# EAGLE board esp8266-dimmer (EAGLE 7.5.0)
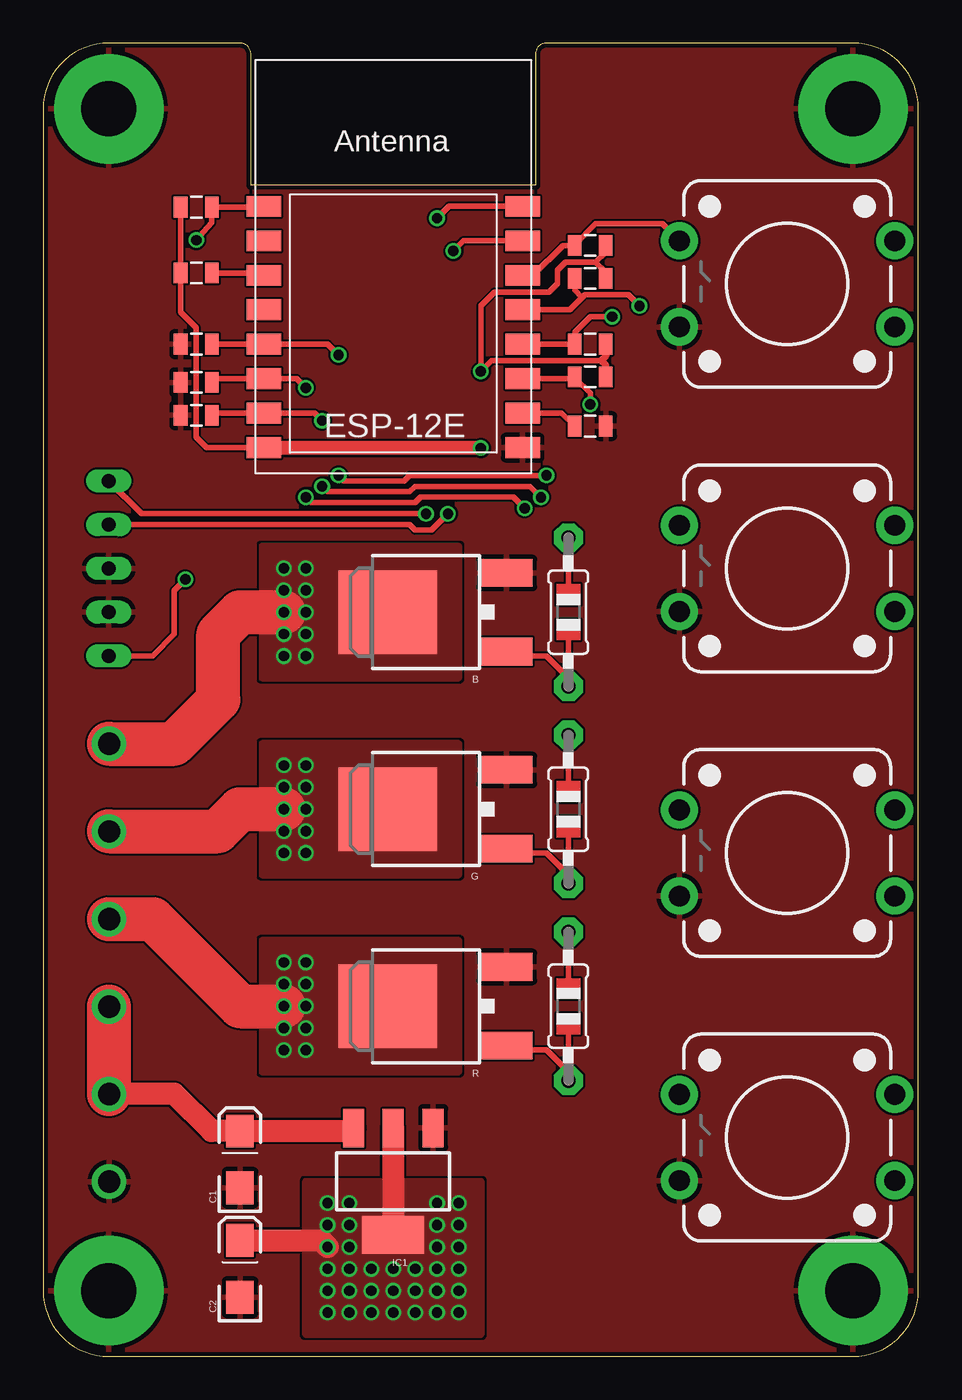
[diagram p0: board, top side]
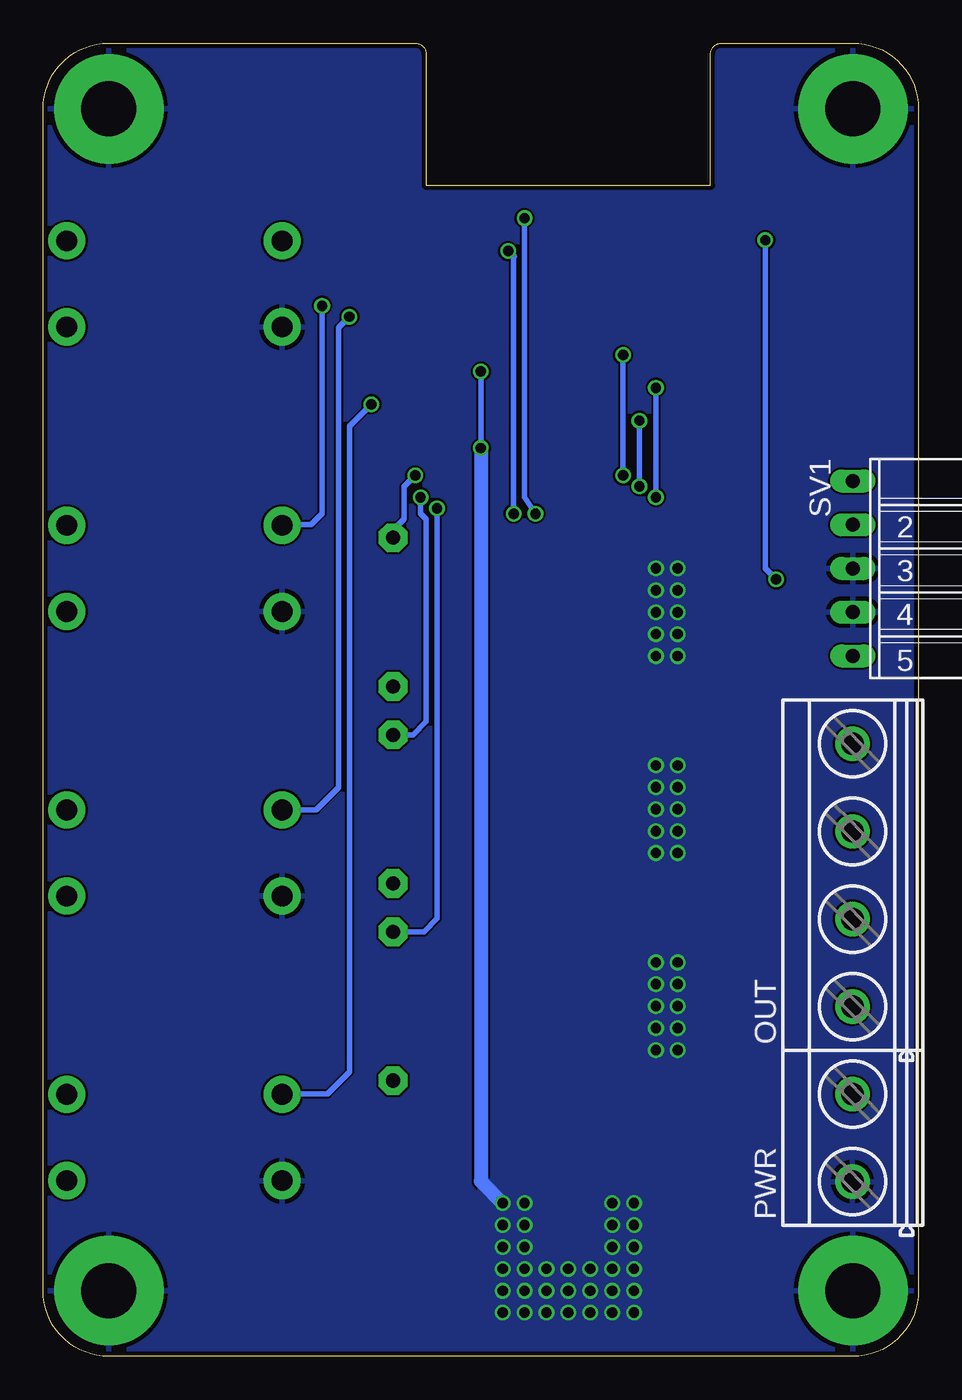
[diagram p1: board, bottom side, seen from below]

Size 50.8 x 76.2 mm. Coordinates in mm from the lower left corner, seen from the top.
Outline: 3.81,0 46.99,0 arc90 50.8,3.81 50.8,72.39 arc90 46.99,76.2 29.21,76.2 arc90 28.57,75.56 28.57,67.94 12.06,67.94 12.06,75.56 arc90 11.43,76.2 3.81,76.2 arc90 0,72.39 0,3.81 arc90 3.81,0
Copper layers (1*16): Top 0.035mm / dielectric 1.5mm / Bottom 0.035mm
Design rules "dirt_cheap_dirty_boards.v1": minimum track width 5mil, minimum drill 12mil, track to track 5mil, track to pad 5mil, pad to pad 5mil, via to via 5mil, smd to smd 0mil, copper to edge 10mil, drill to drill 10mil, minimum pad ring 10mil, minimum via ring 6mil, stop-mask expansion 2mil, vias tented up to drill 25mil, thermal gap 10mil

## Footprints (pad centres in the part's own frame; a part is rotated, then mirrored left to right if it is on the bottom)
DPAK = smd 1.6 x 3: 1 -2.28,-5.31; 3 2.28,-5.31 | smd 4.826 x 5.715: 4 0,1.588
EIA3216-KIT = smd 1.9 x 1.6: A 1.65,0; C -1.65,0
TACTILE-PTH-12MM = drill 1.2 pad 2.159: 1 6.25,-2.5; 2 -6.25,-2.5; 3 6.25,2.5; 4 -6.25,2.5
ESP-12 = smd 2 x 1.2: 1 -7.5,4.5; 2 -7.5,2.5; 3 -7.5,0.5; 4 -7.5,-1.5; 5 -7.5,-3.5; 6 -7.5,-5.5; 7 -7.5,-7.5; 8 -7.5,-9.5; 9 7.5,-9.5; 10 7.5,-7.5; 11 7.5,-5.5; 12 7.5,-3.5; 13 7.5,-1.5; 14 7.5,0.5; 15 7.5,2.5; 16 7.5,4.5
SOT223 = smd 1.219 x 2.235: 1 -2.311,-3.099; 2 0,-3.099; 3 2.311,-3.099 | smd 3.6 x 2.2: 4 0,3.099
MKDSN1,5/4-5,08 = drill 1.3 pad 2: 1 -7.641,0.025; 2 -2.561,0.025; 3 2.519,0.025; 4 7.599,0.025
MKDSN1,5/2-5,08 = drill 1.3 pad 2: 1 -2.561,0.025; 2 2.519,0.025
0805 = smd 0.8 x 1.2: 1 -0.9,0; 2 0.9,0
0805-THM-7 = drill 0.813 pad 1.676 octagon: 1 -4.318,0; 2 4.318,0
STANDOFF-ELECTRICAL = drill 3.2 pad 6.35: P1 0,0
FE05W = drill 0.813 long: 1 -5.08,0; 2 -2.54,0; 3 0,0; 4 2.54,0; 5 5.08,0

## Placement (x,y rotation side)
B  MOSFET-NCHANNELFDD8780  [DPAK]  21.59,43.18 90 top
C1  10uF  [EIA3216-KIT]  11.43,11.43 90 top
C2  10uF  [EIA3216-KIT]  11.43,5.08 90 top
DN  SWITCH-MOMENTARY-212MM  [TACTILE-PTH-12MM]  43.18,29.21 180 top
ESP-12E  [ESP-12]  20.32,62.23 0 top
G  MOSFET-NCHANNELFDD8780  [DPAK]  21.59,31.75 90 top
IC1  [SOT223]  20.32,10.16 180 top
OF  SWITCH-MOMENTARY-212MM  [TACTILE-PTH-12MM]  43.18,12.7 180 top
ON  SWITCH-MOMENTARY-212MM  [TACTILE-PTH-12MM]  43.18,62.23 180 top
OUT  MKDSN1,5/4-5,08  [MKDSN1,5/4-5,08]  3.81,27.94 90 bottom
PWR  MKDSN1,5/2-5,08  [MKDSN1,5/2-5,08]  3.81,12.7 90 bottom
R  MOSFET-NCHANNELFDD8780  [DPAK]  21.59,20.32 90 top
R1  10k  [0805]  31.75,53.98 0 top
R2  10k  [0805]  31.75,56.83 0 top
R3  10k  [0805]  31.75,58.74 0 top
R4  10k  [0805]  8.89,66.67 0 top
R5  10k  [0805]  8.89,62.87 0 top
R6  100R  [0805-THM-7]  30.48,20.32 270 top
R7  100R  [0805-THM-7]  30.48,31.75 270 top
R8  100R  [0805-THM-7]  30.48,43.18 270 top
R9  10k  [0805]  8.89,56.52 0 top
R10  10k  [0805]  8.89,54.61 0 top
R11  10k  [0805]  8.89,58.74 0 top
R12  10k  [0805]  31.75,64.45 180 top
R13  10k  [0805]  31.75,62.55 180 top
S5  STANDOFF_ELECTRICAL  [STANDOFF-ELECTRICAL]  46.99,3.81 0 top
S6  STANDOFF_ELECTRICAL  [STANDOFF-ELECTRICAL]  3.81,3.81 0 top
S7  STANDOFF_ELECTRICAL  [STANDOFF-ELECTRICAL]  46.99,72.39 0 top
S8  STANDOFF_ELECTRICAL  [STANDOFF-ELECTRICAL]  3.81,72.39 0 top
SV1  [FE05W]  3.81,45.72 270 bottom
UP  SWITCH-MOMENTARY-212MM  [TACTILE-PTH-12MM]  43.18,45.72 180 top

## Library data of the parts
B G R = SparkFun-DiscreteSemi; PROD_ID: TRANS-09984
C1 C2 = SparkFun-Passives
DN OF ON UP = SparkFun-Electromechanical; PROD_ID: SWCH-09185
ESP-12E R6-R8 = adafruit66
IC1 = SparkFun-PowerIC; PROD_ID: VREG-08170
OUT PWR = con-phoenix-508
R1-R5 R9-R13 = SparkFun-Resistors
S5-S8 = SparkFun-Electromechanical
SV1 = con-lsta; OC_FARNELL: unknown; OC_NEWARK: unknown

## Nets
+3V3: C2.A ESP-12E.8 IC1.2 IC1.4 R2.2 R3.2 R4.1 R5.1 R12.1 R13.1
+12V: C1.A IC1.3 OUT.1 PWR.2
BOUT: B.4 OUT.4
GND: B.3 C1.C C2.C DN.3 ESP-12E.9 G.3 IC1.1 OF.3 ON.3 PWR.1 R1.2 R9.1 R10.1 R11.1 R.3 S5.P1 S6.P1 S7.P1 S8.P1 SV1.3 SV1.4 UP.3
GOUT: G.4 OUT.3
GPIO0: DN.1 ESP-12E.12 R3.1
GPIO2: ESP-12E.11 OF.1 R2.1
GPIO4: ESP-12E.14 ON.1 R12.2
GPIO5: ESP-12E.13 R13.2 UP.1
GPIO12: ESP-12E.6 R6.1 R9.2
GPIO13: ESP-12E.7 R7.1 R10.2
GPIO14: ESP-12E.5 R8.1 R11.2
GPIO15: ESP-12E.10 R1.1
N$2: B.1 R8.2
N$3: G.1 R7.2
N$4: R6.2 R.1
N$5: ESP-12E.3 R5.2
ROUT: OUT.2 R.4
RST: ESP-12E.1 R4.2 SV1.5
RXD: ESP-12E.15 SV1.2
TXD: ESP-12E.16 SV1.1

## Tracks (layer width: path | path; a pad name or v marks a point on that pad's centre or on a via)
+3V3  (via drill 0.6)
  Top 0.305: 32.38,57.78 26.04,57.78 v25.4,57.15 25.4,60.96 26.19,61.75 29.37,61.75 29.84,62.23 29.84,63.02 30.32,63.5 32.07,63.5 | R4.1 R5.1 7.99,60.59 8.89,59.69 8.89,53.34 9.5,52.73 ESP-12E.8 | R12.1 32.65,64.08 32.07,63.5 | R13.1 32.65,62.92 32.07,63.5
  Top 0.406: R3.2 32.65,58.05 32.38,57.78 32.65,57.52 R2.2 | 12.85,52.7 ESP-12E.8
  Top 0.813: v25.4,52.7 12.85,52.7
  Top 1.27: C2.A 16.13,6.73 v16.51,6.35 | IC1.2 IC1.4
  Bottom 0.305: v25.4,57.15 v25.4,52.7
  Bottom 0.813: v25.4,52.7 25.4,10.16 v24.13,8.89
  other vias: 16.51,2.54 17.78,2.54 19.05,2.54 20.32,2.54 21.59,2.54 22.86,2.54 24.13,2.54 24.13,3.81 22.86,3.81 21.59,3.81 20.32,3.81 19.05,3.81 17.78,3.81 16.51,3.81 16.51,5.08 17.78,5.08 16.51,7.62 16.51,8.89 24.13,7.62 24.13,6.35 24.13,5.08 22.86,5.08 21.59,5.08 20.32,5.08 19.05,5.08 17.78,6.35 17.78,7.62 17.78,8.89 22.86,7.62 22.86,6.35 22.86,8.89
  pour Top (no thermals): 15.24,10.16 25.4,10.16 25.4,1.27 15.24,1.27
  pour Bottom: 15.24,1.27 25.4,1.27 25.4,10.16 15.24,10.16
+12V
  Top 1.27: IC1.3 17.83,13.08 C1.A 9.78,13.08 7.62,15.24 3.86,15.24 PWR.2
  Top 2.54: PWR.2 OUT.1
BOUT  (via drill 0.6)
  Top 2.54: OUT.4 7.6,35.54 10.16,38.1 10.16,41.91 11.43,43.18 v13.97,43.18
  other vias: 13.97,45.72 15.24,45.72 13.97,40.64 15.24,40.64 15.24,41.91 15.24,43.18 15.24,44.45 13.97,44.45 13.97,41.91
  pour Top (no thermals): 12.7,39.37 24.13,39.37 24.13,46.99 12.7,46.99
  pour Bottom: 12.7,39.37 24.13,39.37 24.13,46.99 12.7,46.99
GND
  pour Top (rank 2): -1.27,77.47 52.07,77.47 52.07,-1.27 -1.27,-1.27
  pour Bottom: -1.27,77.47 52.07,77.47 52.07,-1.27 -1.27,-1.27
GOUT  (via drill 0.6)
  Top 2.54: OUT.3 10.14,30.46 11.43,31.75 v13.97,31.75
  other vias: 13.97,34.29 15.24,34.29 15.24,33.02 15.24,31.75 15.24,30.48 15.24,29.21 13.97,29.21 13.97,30.48 13.97,33.02
  pour Top (no thermals): 12.7,27.94 24.13,27.94 24.13,35.56 12.7,35.56
  pour Bottom: 12.7,27.94 24.13,27.94 24.13,35.56 12.7,35.56
GPIO0  (via drill 0.6)
  Top 0.305: ESP-12E.12 R3.1 30.85,59.42 31.75,60.33 v33.02,60.33
  Bottom 0.305: DN.1 34.97,31.71 33.66,33.02 33.66,59.69 v33.02,60.33
GPIO2  (via drill 0.6)
  Top 0.305: ESP-12E.11 30.75,56.73 30.9,56.73 31.75,55.88 v31.75,55.24
  Top 0.406: 30.75,56.73 R2.1
  Bottom 0.305: v31.75,55.24 33.02,53.98 33.02,16.51 34.29,15.24 36.89,15.24 OF.1
GPIO4
  Top 0.305: ESP-12E.14 28.44,62.73 30.16,64.45 R12.2 30.85,64.5 32.07,65.72 35.94,65.72 ON.1
GPIO5  (via drill 0.6)
  Top 0.305: R13.2 30.85,61.86 31.27,61.44 | 31.27,61.44 31.43,61.59 33.97,61.59 v34.61,60.96 | ESP-12E.13 30.57,60.73 31.27,61.44
  Bottom 0.305: v34.61,60.96 34.61,48.9 35.24,48.26 36.89,48.26 UP.1
GPIO12  (via drill 0.6)
  Top 0.305: R9.2 10.01,56.73 ESP-12E.6 14.71,56.73 v15.24,56.2 | v27.94,49.21 27.3,49.85 21.91,49.85 21.59,49.53 15.56,49.53 v15.24,49.85
  Bottom 0.305: R6.1 28.7,24.64 27.94,25.4 v27.94,49.21 | v15.24,49.85 v15.24,56.2
GPIO13  (via drill 0.6)
  Top 0.305: R10.2 9.91,54.73 ESP-12E.7 15.76,54.73 v16.19,54.29 | v28.89,49.85 28.26,50.48 21.59,50.48 21.27,50.16 16.51,50.16 v16.19,50.48
  Bottom 0.305: R7.1 29.34,36.07 28.57,36.83 28.57,48.58 28.89,48.9 v28.89,49.85 | v16.19,50.48 v16.19,54.29
GPIO14  (via drill 0.6)
  Top 0.305: R11.2 ESP-12E.5 16.52,58.73 v17.14,58.1 | v29.21,51.12 21.27,51.12 20.95,50.8 17.46,50.8 v17.14,51.12
  Bottom 0.305: R8.1 30.48,47.94 29.84,48.58 29.84,50.48 v29.21,51.12 | v17.14,51.12 v17.14,58.1
GPIO15
  Top 0.305: ESP-12E.10 30.09,54.73 R1.1
N$2
  Top 0.305: R8.2 30.48,39.37 29.21,40.64 27.16,40.64
  Top 0.406: 27.16,40.64 B.1
N$3
  Top 0.305: R7.2 30.48,27.94 29.21,29.21 26.67,29.21
  Top 0.406: 26.67,29.21 26.67,29.24 G.1
N$4
  Top 0.305: R6.2 30.48,16.51 29.21,17.78 27.16,17.78
  Top 0.406: 27.16,17.78 R.1
N$5
  Top 0.305: R5.2 12.69,62.87
  Top 0.406: 12.69,62.87 ESP-12E.3
ROUT  (via drill 0.6)
  Top 2.54: OUT.2 6.37,25.38 11.43,20.32 v13.97,20.32
  other vias: 13.97,22.86 13.97,21.59 13.97,19.05 13.97,17.78 15.24,17.78 15.24,19.05 15.24,20.32 15.24,21.59 15.24,22.86
  pour Top (no thermals): 24.13,16.51 24.13,24.13 12.7,24.13 12.7,16.51
  pour Bottom: 12.7,16.51 24.13,16.51 24.13,24.13 12.7,24.13
RST  (via drill 0.6)
  Top 0.305: 12.77,66.67 R4.2 9.79,65.78 v8.89,64.77 | v8.26,45.09 7.62,44.45 7.62,41.91 6.35,40.64 SV1.5
  Top 0.406: 12.77,66.67 ESP-12E.1
  Bottom 0.305: v8.89,64.77 8.89,45.72 v8.26,45.09
RXD  (via drill 0.6)
  Top 0.305: ESP-12E.15 24.41,64.73 v23.81,64.14 | v23.5,48.9 22.54,47.94 21.59,47.94 21.27,48.26 SV1.2
  Bottom 0.305: 23.5,63.82 v23.5,48.9
  Bottom 0.406: v23.81,64.14 23.5,63.82
TXD  (via drill 0.6)
  Top 0.305: ESP-12E.16 23.55,66.73 v22.86,66.04 | v22.23,48.9 5.71,48.9 SV1.1
  Bottom 0.305: v22.86,66.04 22.86,49.85 v22.23,48.9

## Text on the board
tValues: + | +
bValues: B | G | R | VOUT | VIN | GND